# Allegro board CHOPPING_WAVE_OSC.brd
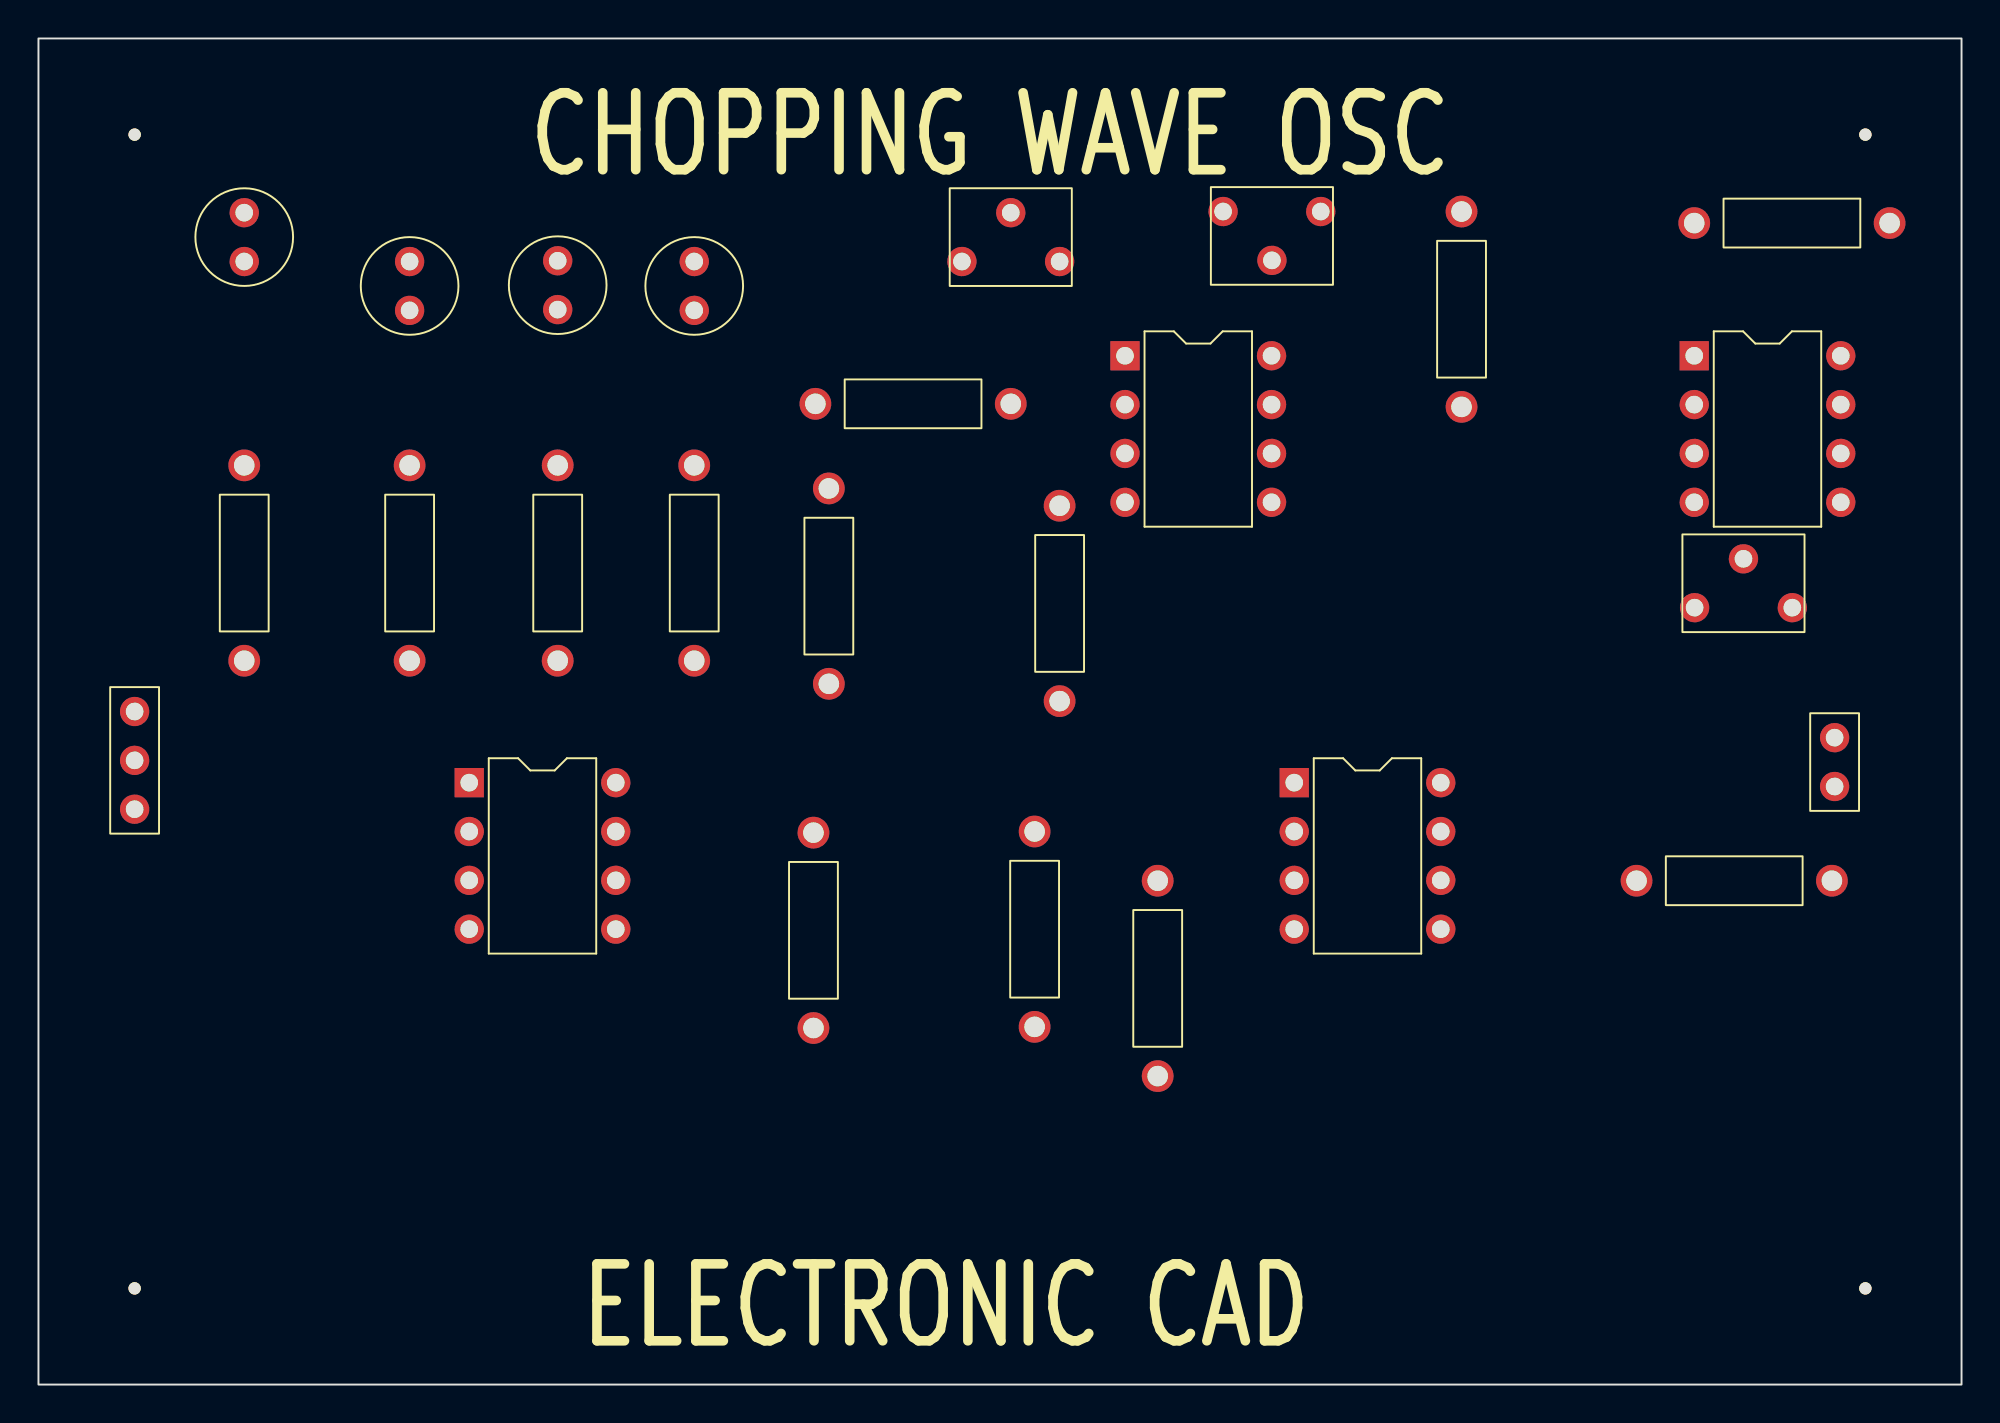
[diagram p0: board, top side]
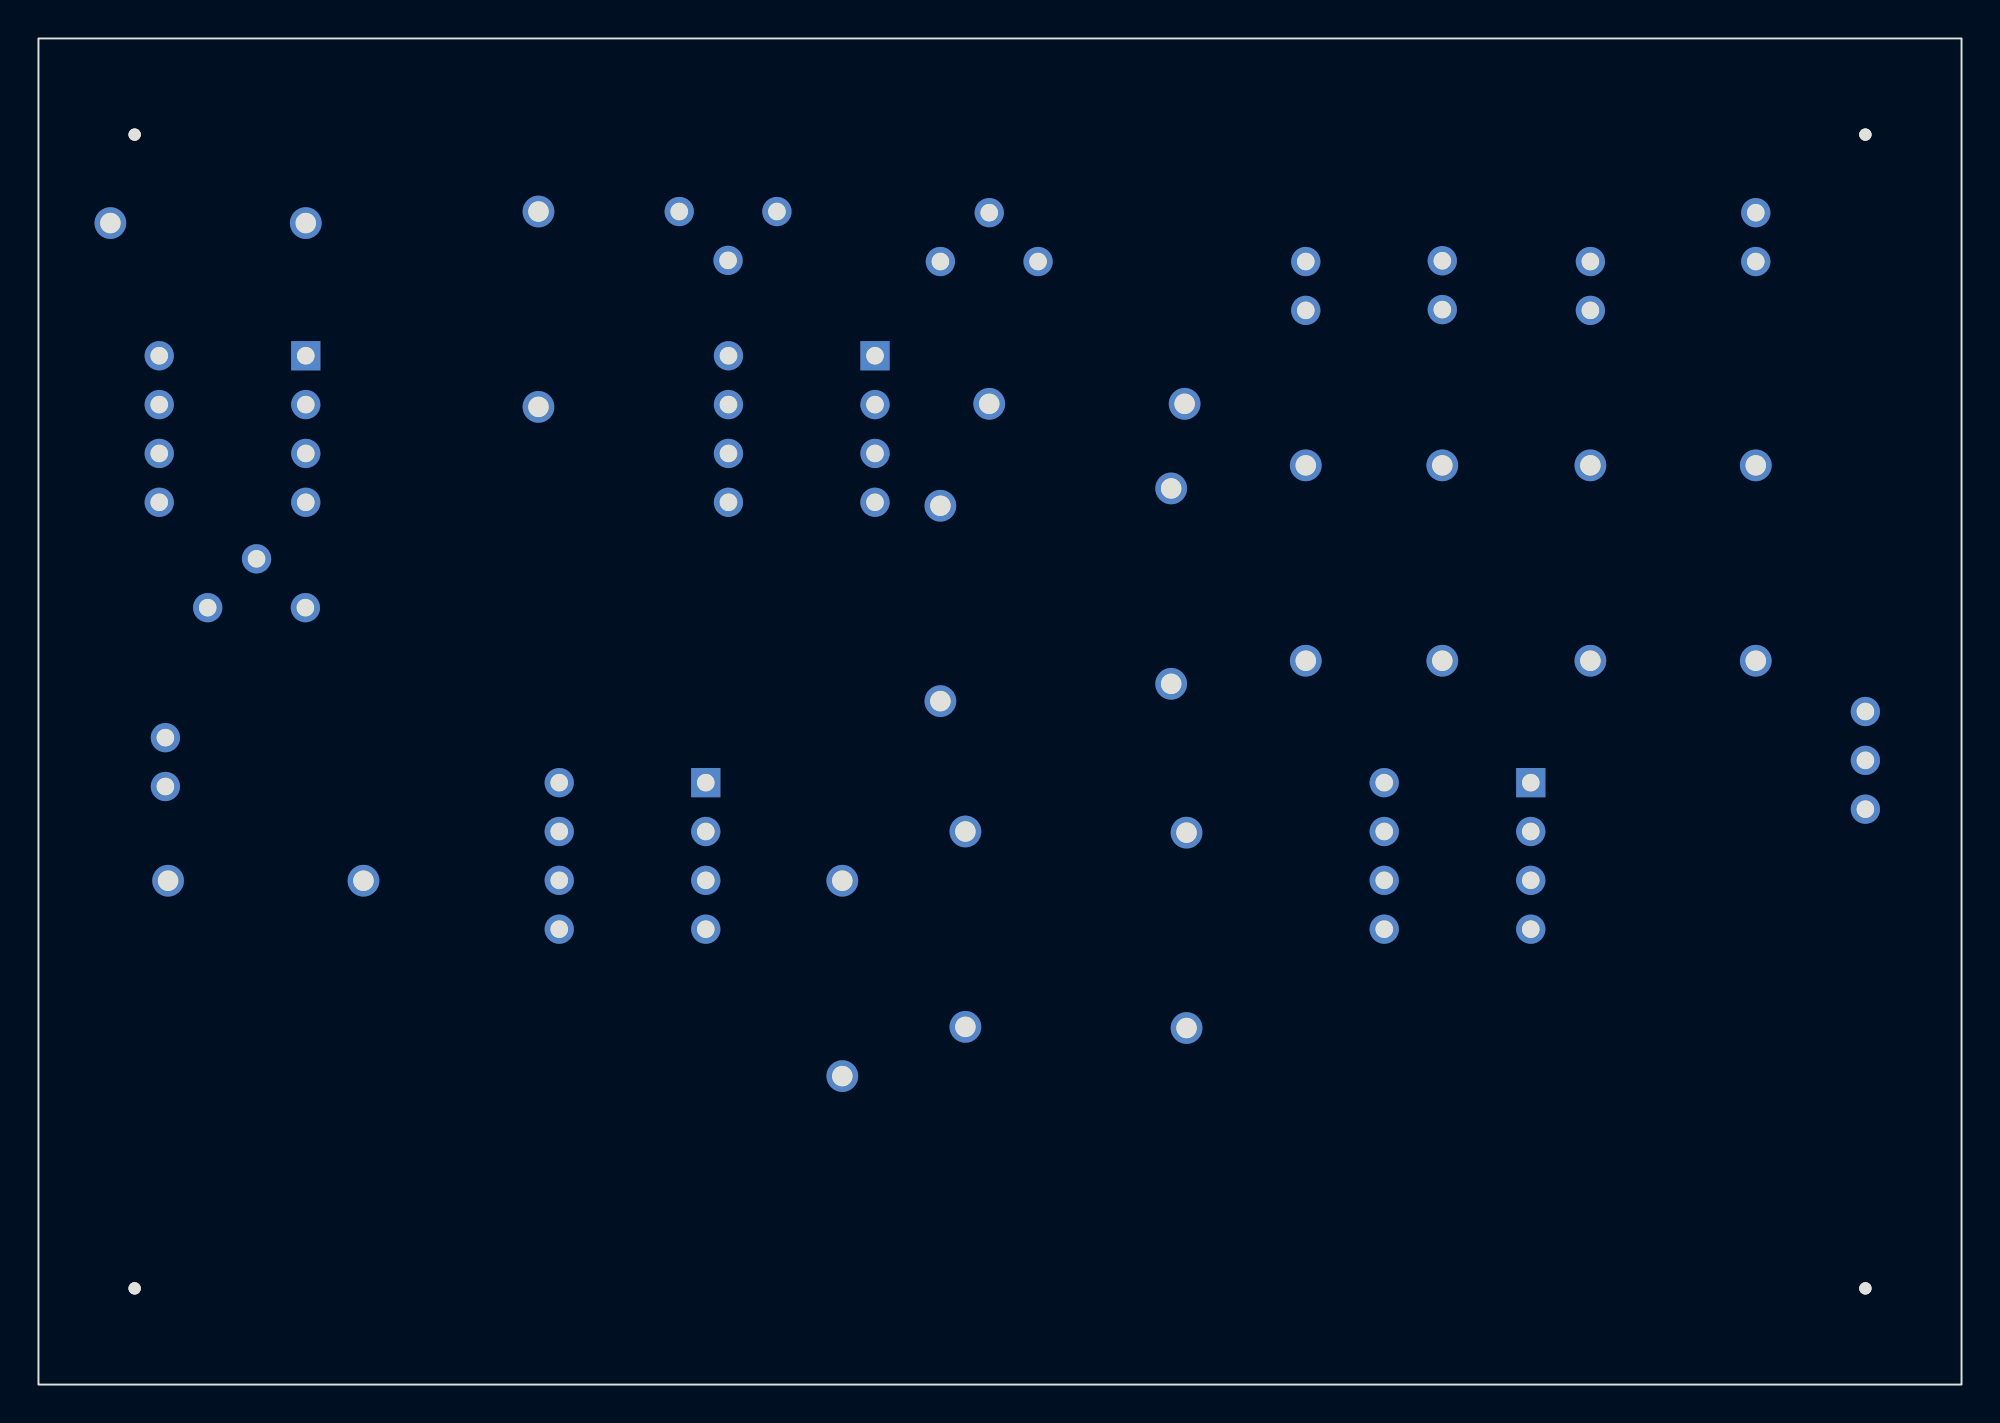
[diagram p1: board, bottom side, seen from below]

Outline 100 x 70 mm; copper layers: TOP, BOTTOM. Coordinates in mm from the lower left corner of the outline.
Outline path: rectangle 0,0 100,70

## Design rules (mm)
constraint set DEFAULT: min track width 0.127

## Placement (name value [footprint] x y rotation side)
C1  0.001uF  [CAP196]  10.7 58.4 0 top
C2  0.001uF  [CAP196]  19.3 58.4 180 top
C3  0.001uF  [CAP196]  27 55.9 0 top
C4  0.001uF  [CAP196]  34.1 58.4 180 top
J1  CON3  [JUMPER3]  5 35 270 top
J2  CON2  [JUMPER2]  93.4 31.1 90 top
NOREF  -  [unnamed]  95 5 0 top
NOREF#2  -  [unnamed]  5 5 0 top
NOREF#3  -  [#2]  0 70 0 top
NOREF#4  -  [unnamed]  5 65 0 top
NOREF#5  -  [unnamed]  95 65 0 top
NOREF#6  -  [#2]  100 0 90 top
R2  15K  [RES400]  53.1 45.7 180 top
R3  1K  [RES400]  41.1 46.6 180 top
R4  4.7K  [RES400]  10.7 47.8 180 top
R5  4.7K  [RES400]  19.3 47.8 180 top
R6  4.7K  [RES400]  27 47.8 180 top
R7  4.7K  [RES400]  34.1 47.8 180 top
R8  10K  [RES400]  40.4 51 270 top
R10  20K  [RES400]  74 61 180 top
R11  10K  [RES400]  86.1 60.4 270 top
R12  8.2K  [RES400]  40.3 28.7 180 top
R13  2.2K  [RES400]  51.8 18.6 0 top
R14  10K  [RES400]  83.1 26.2 270 top
R15  5.1K  [RES400]  58.2 26.2 180 top
U1  LF356  [DIP8_3]  56.5 53.5 0 top
U2  LF356  [DIP8_3]  86.1 53.5 0 top
U3  LF356  [DIP8_3]  22.4 31.3 0 top
U4  LF356  [DIP8_3]  65.3 31.3 0 top
VR1  470K  [RESADJ]  53.1 58.4 270 top
VR2  100K  [RESADJ]  61.6 61 90 top
VR3  10K  [RESADJ]  91.2 40.4 270 top

## Library data of the parts
C1-C4 = C: Tolerance: ***; User Part Number: ***
J1 = CON3: User Part Number: ***
J2 = CON2: User Part Number: ***
R2-R8 R10-R15 = R: Tolerance: ***; User Part Number: ***
U1-U4 = LF356_1: Tolerance: ***; User Part Number: ***
VR1-VR3 = POT: Tolerance: ***; User Part Number: ***

## Footprints (pads in the part's own frame, mm; a bottom-side part is the same pattern mirrored in y, then rotated)
CAP196
  round 1.524 hole 0.914: 1(0,0) 2(0,2.54)
DIP8_3
  rect 1.524x1.524 hole 0.914: 1(0,0)
  round 1.524 hole 0.914: 2(0,-2.54) 3(0,-5.08) 4(0,-7.62) 5(7.62,-7.62) 6(7.62,-5.08) 7(7.62,-2.54) 8(7.62,0)
JUMPER2
  round 1.524 hole 0.914: 1(0,0) 2(2.54,0)
JUMPER3
  round 1.524 hole 0.914: 1(0,0) 2(2.54,0) 3(5.08,0)
RES400
  round 1.651 hole 1.067: 1(0,0) 2(0,10.16)
RESADJ
  round 1.524 hole 0.914: 1(0,0) 2(-2.54,-2.54) 3(0,-5.08)
unnamed
  round 0.635 hole 3.175 unplated: (0,0)

## Nets
+12V: J1.1 U1.7 U2.7 U3.7 U4.7 VR3.1
-12V: J1.3 U1.4(V-) U2.4(V-) U3.4(V-) U4.4(V-) VR3.3
GND: J1.2 J2.2 R3.2 R4.2 R5.2 R6.2 R7.2 R15.2 U3.3
OUT: J2.1 R14.2 U4.6
PORTRIGHT-L: R12.1 U3.2
SIG: R11.2 U2.6
N00736: C1.1 C2.1 R4.1
N00770: C2.2 C3.1 R5.1
N00774: C3.2 C4.1 R6.1
N00778: C4.2 R7.1 R8.1
N00812: C1.2 U1.6 VR1.2(WIPER) VR1.3 VR2.1 VR2.2(WIPER)
N00890: R2.1 VR1.1
N01000: R2.2 R8.2 U1.2
N01037: R3.1 U1.3
N01247: R10.1 VR2.3
N01251: R10.2 R11.1 U2.2
N01369: U2.3 VR3.2(WIPER)
N02677: R13.2 R14.1 U4.2
N02698: R12.2 R13.1 U3.6
N02817: R15.1 U4.3

Pads without a net: U1 1 5 8; U2 1 5 8; U3 1 5 8; U4 1 5 8

## Text on the board
Ref Des/Silkscreen Top: CHOPPING WAVE OSC | ELECTRONIC CAD
